# Altium PCB breakout_breadboard.PcbDoc
Units mm, origin at the board's own origin, x right, y up, seen from the top; angles counter-clockwise.
Board outline 113.33 x 27.99 mm, 2 copper layers (Top Layer, Bottom Layer), stack 1.661 mm thick; 3 components, 59 nets, 183 pads, 38 vias.
Unrouted connection lines stored in the file: 7.
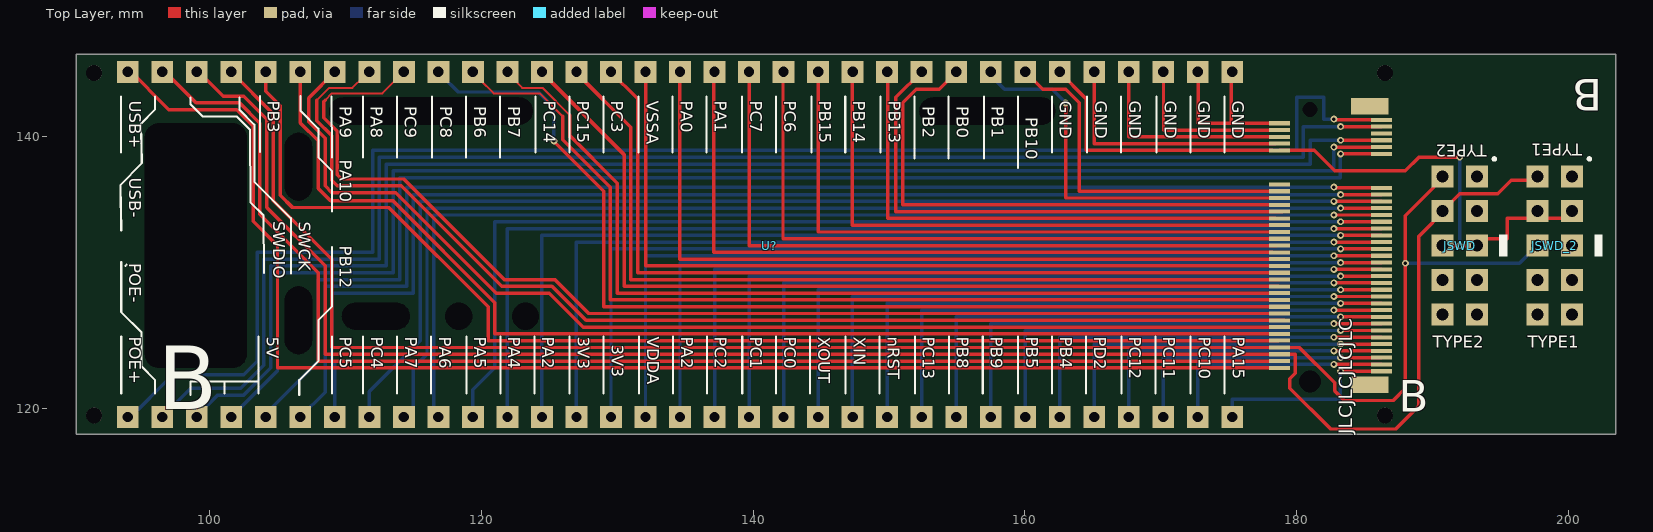
[diagram p0: Top Layer view]
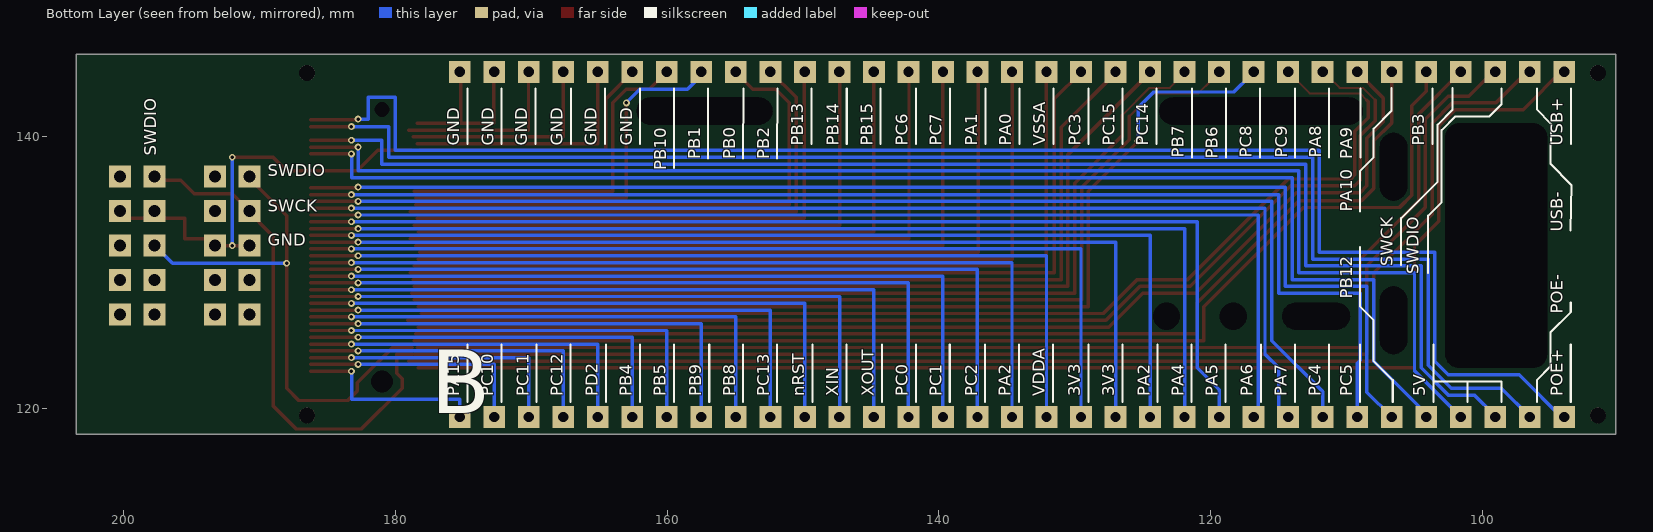
[diagram p1: Bottom Layer view, seen from below]

## Layer stack, top to bottom
Top Solder: solder mask 0.0102, Solder Resist, Dk 3.5
Top Layer: signal copper 0.0356
Dielectric 1: core 1.59, FR-4, Dk 4.2
Bottom Layer: signal copper 0.0356
Bottom Solder: solder mask 0.0102, Solder Resist, Dk 3.5

## Board outline
90.17,118.11 90.17,146.097 203.5,146.097 203.5,118.11

## Design rules (kind name [scope] priority, off if disabled: settings)
Clearance [All] p1: gap=0.2 ignorepadtopadclearanceinfootprint=FALSE except(0: Arc-Hole Track-Hole SMDPad-Hole THPad-Hole Via-Hole Fill-Hole Poly-Hole Region-Hole Text-Hole)
PolygonConnect [All] p1: thpad.connectstyle=Relief thpad.reliefconductorwidth=0.254 thpad.reliefentries=4 thpad.polygonreliefangle="90 Angle" thpad.airgapwidth=0.254 smdpad.connectstyle=Relief smdpad.reliefconductorwidth=0.254 smdpad.reliefentries=4 smdpad.polygonreliefangle="90 Angle" smdpad.airgapwidth=0.254 via.connectstyle=Direct via.reliefconductorwidth=0.254 via.reliefentries=4 via.polygonreliefangle="90 Angle" via.airgapwidth=0.254
RoutingVias [All] p1: holewidth=0.711 width=1.27 viastyle="Through Hole" minholewidth=0.711 minwidth=1.27 maxholewidth=0.711 maxwidth=1.27
SolderMaskExpansion [All] p1: expansion=0.102
Width [All] p1: maxlimit=1 minlimit=0.254 preferedwidth=0.254
30 further rules are at their usual default settings.

## Components (designator, comment, footprint, x,y, rotation, side; value= is the part's Value field where it differs from the comment)
JSWD "DS1023-2*5SF11" HDR_FEM_2X5P 192,132 r270 top
JSWD_2 "DS1023-2*5SF11" HDR_FEM_2X5P 199,132 r270 top
U? "BITSNAP_GF_B" POWERNET-MAC 182.74,132 r90 top

## Footprints (in the part's own frame and the unit in brackets; to place one, negate y for a bottom-side part, rotate by r counter-clockwise, add the part's x,y. Pads: shape width x height; smd on the part's side, far side on the other; paste and mask are expansions set on the pad)
HDR_FEM_2X5P [mm] "10 Pin 2 Row Header"
  rect 1.6x1.6 hole 0.9: 1(-5.08,1.27) 2(-5.08,-1.27) 3(-2.54,1.27) 4(-2.54,-1.27) 5(0,1.27) 6(0,-1.27) 7(2.54,1.27) 8(2.54,-1.27) 9(5.08,1.27) 10(5.08,-1.27)
  silkscreen extent -6.47,2.44 -6.27,2.64
POWERNET-MAC [mm] "IC - Powernet MAC - NGFF B KEY, TE 2199119-3"
  rect 0.3x1.55 smd: 1(9.25,-3.5) 2(9,4) 3(8.75,-3.5) 4(8.5,4) 5(8.25,-3.5) 6(8,4) 7(7.75,-3.5) 8(7.5,4) 9(7.25,-3.5) 10(7,4) 11(6.75,-3.5) 20(4.5,4) 21(4.25,-3.5) 22(4,4) 23(3.75,-3.5) 24(3.5,4) 25(3.25,-3.5) 26(3,4) 27(2.75,-3.5) 28(2.5,4) 29(2.25,-3.5) 30(2,4) 31(1.75,-3.5) 32(1.5,4) 33(1.25,-3.5) 34(1,4) 35(0.75,-3.5) 36(0.5,4) 37(0.25,-3.5) 38(0,4) 39(-0.25,-3.5) 40(-0.5,4) 41(-0.75,-3.5) 42(-1,4) 43(-1.25,-3.5) 44(-1.5,4) 45(-1.75,-3.5) 46(-2,4) 47(-2.25,-3.5) 48(-2.5,4) 49(-2.75,-3.5) 50(-3,4) 51(-3.25,-3.5) 52(-3.5,4) 53(-3.75,-3.5) 54(-4,4) 55(-4.25,-3.5) 56(-4.5,4) 57(-4.75,-3.5) 58(-5,4) 59(-5.25,-3.5) 60(-5.5,4) 61(-5.75,-3.5) 62(-6,4) 63(-6.25,-3.5) 64(-6.5,4) 65(-6.75,-3.5) 66(-7,4) 67(-7.25,-3.5) 68(-7.5,4) 69(-7.75,-3.5) 70(-8,4) 71(-8.25,-3.5) 72(-8.5,4) 73(-8.75,-3.5) 74(-9,4) 75(-9.25,-3.5)
  round 0 hole 1.6 unplated: 76(-10,1.75)
  round 0 hole 1.1 unplated: 76(10,1.75)
  round 1.524 hole 2 slot 7 at 90 deg unplated: H(-8,83.9) H(8,83.9)
  round 1.524 hole 2 slot 5 at 0 deg unplated: H(-5.5,76.2) H(5.8,76.2)
  round 1.524 hole 2 slot 5 at 90 deg unplated: H(-5.2,70.5)
  round 1.524 hole 2 unplated: H(-5.2,59.5) H(-5.2,64.4)
  round 1.524 hole 2 slot 18 at 0 deg unplated: H(0,86.5) H(0,86) H(0,85.5) H(0,85) H(0,84.5) H(0,84) H(0,83.5) H(0,83) H(0,82.5) H(0,82) H(0,81.5) H(0,81.1) H(0,81)
  round 1.524 hole 2 slot 15 at 90 deg unplated: H(9.9,66.45)
  round 1.524 hole 2 slot 10 at 90 deg unplated: H(9.9,25.5)
  rect 1.2x2.75 smd: M(-10.25,-2.65) M(10.25,-2.65)
  Bottom Layer pour cut-out: -17.2,17.6
  Bottom Layer pour cut-out: -17.2,17.6
  body extent -10.99,-4.1 11.01,91.64, height 16.88

## Part data
JSWD JSWD_2: "J - JACK - PIN_HEADER 2X5P", JLC Availability=Extended, LCSC Part #=C92270
U?: library part POWERNET_MAC, "U - IC - Bitsnap CPU, NGFF B Key", LCSC Part #=C2761344, Manufacturer=Foxconn, Manufacturer P/N=AS0BC21-S30BB-7H

## Free pads (board coordinates)
  rect 1.6x1.6 hole 0.762: 2(93.98,119.38) 2(93.98,144.78) 2(96.52,119.38) 2(96.52,144.78) 2(99.06,119.38) 2(99.06,144.78) 2(101.6,119.38) 2(101.6,144.78) 2(104.14,119.38) 2(104.14,144.78) 2(106.68,119.38) 2(106.68,144.78) 2(109.22,119.38) 2(109.22,144.78) 2(111.76,119.38) 2(111.76,144.78) 2(114.3,119.38) 2(114.3,144.78) 2(116.84,119.38) 2(116.84,144.78) 2(119.38,119.38) 2(119.38,144.78) 2(121.92,119.38) 2(121.92,144.78) 2(124.46,119.38) 2(124.46,144.78) 2(127,119.38) 2(127,144.78) 2(129.54,119.38) 2(129.54,144.78) 2(132.08,119.38) 2(132.08,144.78) 2(134.62,119.38) 2(134.62,144.78) 2(137.16,119.38) 2(137.16,144.78) 2(139.7,119.38) 2(139.7,144.78) 2(142.24,119.38) 2(142.24,144.78) 2(144.78,119.38) 2(144.78,144.78) 2(147.32,119.38) 2(147.32,144.78) 2(149.86,119.38) 2(149.86,144.78) 2(152.4,119.38) 2(152.4,144.78) 2(154.94,119.38) 2(154.94,144.78) 2(157.48,119.38) 2(157.48,144.78) 2(160.02,119.38) 2(160.02,144.78) 2(162.56,119.38) 2(162.56,144.78) 2(165.1,119.38) 2(165.1,144.78) 2(167.64,119.38) 2(167.64,144.78) 2(170.18,119.38) 2(170.18,144.78) 2(172.72,119.38) 2(172.72,144.78) 2(175.26,119.38) 2(175.26,144.78)
  round 1.152 hole 1.152 unplated: 11(91.5,119.5) 11(91.5,144.7) 11(186.5,119.5) 11(186.5,144.7)

## Via types
v1: diameter 0.508, hole 0.254, Top Layer to Bottom Layer, tented both sides, 38 vias

## Nets (pads, with @x,y where several pads share a name; then routed paths per layer and width w, separated by ;. In a path a pad name is that pad's centre, name@x,y a point inside that pad or via, vN(x,y) a via of type N, cw(c..) or ccw(c..) an arc to the next point about the centre after c; other vN are vias at no path point)
&^~PB6_SCL1: pad.2@119.38,144.78 U?.54 | length 71.3
  Top Layer w0.15: pad.2@119.9,144.2 120.9,143.2 124.3,143.2 126,141.5
  Top Layer w0.254: 126,141.5 126,139.8 129.5,136.3 129.5,128 U?.54@178.6,128
&^~PB7_SDA1: pad.2@121.92,144.78 U?.52 | length 69.3
  Top Layer w0.15: pad.2@121.9,144.7 123,143.6 124.5,143.6 126.5,141.6
  Top Layer w0.254: 126.5,140 126.5,140.1 ; 126.5,141.6 126.5,140.1 ; U?.52@178.8,128.5 U?.52 130,128.5 130,136.6 126.5,140.1
&~PA1_ADC1: pad.2@137.16,144.78 U?.40 | length 54.4
  Top Layer w0.254: pad.2@137.1,144.8 137.1,131.5 176.2,131.5 U?.40@178.2,131.5
^PA15: pad.2@175.26,119.38 U?.75 | length 14.5
  Top Layer w0.254: v1@183.19,122.7 183.19,122.75 U?.75
  Bottom Layer w0.254: pad.2@175.25,119.35 175.25,120.7 183.2,120.7 v1@183.2,122.75
  other v1: 183.24,122.75
^PB2_BOOT1: pad.2@152.4,144.78 U?.28 | length 39.5
  Top Layer w0.254: pad.2@152.4,144.8 150.5,142.9 150.5,134.5 U?.28 U?.28@178.9,134.5
^PB4: pad.2@162.56,119.38 U?.65 | length 29.5
  Top Layer w0.254: v1(182.74,125.25) U?.65
  Bottom Layer w0.254: pad.2@162.56,119.4 162.56,125.25 182.7,125.25 v1@182.7,125.2
^PB10_SCL2_RX3: pad.2@160.02,144.78 U?.22 | length 26.1
  Top Layer w0.254: pad.2@160,144.8 160.02,144.78 161.3,143.5 163,143.5 164,142.5 164,136 U?.22@178.6,136
^PB11_SDA2_TX3: U?.20
^PB12_SS2: pad.2@106.68,119.38 U?.21 | length 95.4
  Top Layer w0.254: v1(182.74,136.3) 182.74,136.25 U?.21
  Bottom Layer w0.254: pad.2@106.68,119.4 108.5,121.22 108.5,129 114.5,129 114.5,136.3 v1@182.7,136.3
^PB13_SCK2: pad.2@149.86,144.78 U?.30 | length 39.6
  Top Layer w0.254: pad.2@149.9,144.7 149.9,134 175.8,134 ; 176.2,134 175.8,134 ; U?.30@178.4,134 175.8,134
^PB14_MISO2: pad.2@147.32,144.78 U?.32 | length 42.5
  Top Layer w0.254: pad.2@147.3,144.7 147.3,133.5 176.2,133.5 U?.32@178.6,133.5
^PB15_MOSI2: pad.2@144.78,144.78 U?.34 | length 45.7
  Top Layer w0.254: pad.2@144.8,144.7 144.8,133 175.7,133 ; 176.2,133 175.7,133 ; U?.34@178.3,133 175.7,133
^~PA8: pad.2@111.76,144.78 U?.60 | length 84.8
  Top Layer w0.15: 107.9,142.7 108.8,143.6 110.5,143.6 pad.2@111.3,144.4
  Top Layer w0.25: 107.9,141.2 107.9,142.7 ; 109,140.1 109,136.8 109.4,136.4 114.1,136.4 121.5,129 125.2,129 127.7,126.5 176.2,126.5 U?.60@179.1,126.5
  Top Layer w0.254: 107.9,141.2 109,140.1
^~PA9_TX1: pad.2@109.22,144.78 U?.62 | length 83.9
  Top Layer w0.254: pad.2@109.2,144.8 109.22,144.78 107.3,142.86 107.3,141.1 108.5,139.9 108.5,136.4 109,135.9 113.7,135.9 121.1,128.5 125,128.5 127.5,126 176.1,126 ; 176.2,126 176.1,126 ; U?.62@178.3,126 176.1,126
^~PA10_RX1: pad.2@106.68,144.78 U?.64 | length 85.6
  Top Layer w0.254: pad.2@106.68,144.78 106.68,141.02 108,139.7 108,136.2 108.9,135.3 113.5,135.3 121,127.8 121,125.5 176,125.5 ; 176.2,125.5 176,125.5 ; U?.64@178.5,125.5 176,125.5
eth_V+: pad.2@93.98,119.38 U?.1 | length 115.1
  Top Layer w0.254: v1(182.74,141.3) 182.74,141.25 U?.1
  Bottom Layer w0.254: pad.2@94,119.2 97.3,122.5 102.5,122.5 103.5,123.5 103.5,131.5 112,131.5 112,139 180,139 180,142.9 182,142.9 182,141.3 v1(182.74,141.3)
eth_V-: pad.2@96.52,119.38 U?.3 | length 108.9
  Top Layer w0.254: v1(183.24,140.75) U?.3
  Bottom Layer w0.254: pad.2@96.5,119.4 98.6,121.5 102.3,121.5 104,123.2 104,131 112.5,131 112.5,138.5 180.5,138.5 180.5,140.75 v1(183.24,140.75)
GND: JSWD.5 JSWD.6 JSWD_2.3 JSWD_2.4 pad.2@162.56,144.78 pad.2@165.1,144.78 pad.2@167.64,144.78 pad.2@170.18,144.78 pad.2@172.72,144.78 pad.2@175.26,144.78 U?.2 U?.4 U?.6 U?.8 U?.10 | length 114.1
  Top Layer w0.254: pad.2@162.55,144.75 164.5,142.8 164.5,139 U?.10@178.2,139 ; pad.2@165.1,144.8 165.1,144.78 165.1,139.5 175.3,139.5 ; pad.2@167.65,144.75 167.65,140 176.1,140 ; pad.2@170.2,144.75 170.2,140.5 U?.4 U?.4@179,140.5 ; pad.2@172.75,144.75 172.75,141 175.2,141 ; pad.2@175.2,144.8 175.2,141 ; 176.2,139.5 175.3,139.5 ; 176.2,140 176.1,140 ; U?.8@178.4,139.5 175.3,139.5 ; U?.2@178.4,141 175.2,141 ; U?.6@178.7,140 176.1,140 ; U?.10@178.8,139 181.3,139 182.8,137.5 188,137.5 189,138.5 v1(192,138.5) ; JSWD.6 v1(192,132) JSWD.5 193.77,132.5 195.5,132.5 195.5,134 JSWD_2.3@200.5,134
  Bottom Layer w0.254: v1(192,132) v1(192,138.5)
NRST: pad.2@149.86,119.38 U?.55 | length 44.9
  Top Layer w0.254: v1(183.24,127.75) U?.55
  Bottom Layer w0.254: pad.2@149.86,119.3 149.86,127.75 v1(183.24,127.75) 183.3,127.75 v1@183.3,127.7
PA4_ADC4_SS1: pad.2@121.92,119.38 U?.33 | length 78.3
  Top Layer w0.254: v1(182.74,133.25) U?.33
  Bottom Layer w0.254: pad.2@121.92,119.35 121.92,133.25 v1(182.74,133.25) 182.8,133.25 v1@182.8,133.3
PA5_ADC5_SCK1: pad.2@119.38,119.38 U?.31 | length 80.4
  Top Layer w0.254: v1(183.24,133.75) U?.31
  Bottom Layer w0.254: pad.2@119.38,119.3 119.38,119.38 119.38,121.38 121,123 121,133.75 183.2,133.75 v1@183.2,133.7
PB3: pad.2@104.14,144.78 U?.66 | length 88.8
  Top Layer w0.254: pad.2@104.14,144.78 104.14,143.36 105.2,142.3 105.2,135.7 106.1,134.8 113.2,134.8 120.5,127.5 120.5,125 176.2,125 U?.66@178.6,125
PB5: pad.2@160.02,119.38 U?.63 | length 32.6
  Top Layer w0.254: v1(183.24,125.75) U?.63
  Bottom Layer w0.254: pad.2@160.02,119.35 160.02,125.75 183.2,125.75 v1@183.2,125.7
PC0: pad.2@142.24,119.38 U?.49 | length 54
  Top Layer w0.254: v1(182.74,129.25) U?.49
  Bottom Layer w0.254: pad.2@142.24,119.38 142.24,129.25 180.2,129.25 v1(182.74,129.25) 182.8,129.25 v1@182.8,129.2
PC1: pad.2@139.7,119.38 U?.47 | length 56.6
  Top Layer w0.254: v1(183.24,129.75) U?.47
  Bottom Layer w0.254: pad.2@139.7,119.75 139.7,129.75 183.2,129.75 v1@183.2,129.8
PC2: pad.2@137.16,119.38 U?.45 | length 59.8
  Top Layer w0.254: v1(182.74,130.25) U?.45
  Bottom Layer w0.254: pad.2@137.16,119.5 137.16,130.25 182.7,130.25 v1@182.7,130.3
PC3: pad.2@129.54,144.78 U?.46 | length 63
  Top Layer w0.254: pad.2@129.5,144.8 131.5,142.8 131.5,130 U?.46 U?.46@178.9,130
PC4: pad.2@111.76,119.38 U?.25 | length 88.2
  Top Layer w0.254: v1(182.74,135.25) U?.25
  Bottom Layer w0.254: pad.2@111.76,119.3 111.76,119.38 111.76,121.26 115.5,125 115.5,135.25 182.7,135.25 v1@182.7,135.3
PC5: pad.2@109.22,119.38 U?.23 | length 93.9
  Top Layer w0.254: v1(183.24,135.75) U?.23
  Bottom Layer w0.254: pad.2@109.22,119.2 109.22,119.38 109.22,123.338 109,123.557 109,128.5 115,128.5 115,135.75 183.2,135.75 v1@183.2,135.7
PC6: pad.2@142.24,144.78 U?.36 | length 49
  Top Layer w0.254: pad.2@142.2,144.8 142.2,132.5 U?.36 U?.36@178.9,132.5
PC7: pad.2@139.7,144.78 U?.38 | length 51.7
  Top Layer w0.254: pad.2@139.7,144.7 139.7,132 176,132 ; 176.2,132 176,132 ; U?.38@178.5,132 176,132
PC8: pad.2@116.84,144.78 U?.56 | length 74.7
  Top Layer w0.254: v1@125.3,139.7 129,136 129,127.5 176.2,127.5 U?.56@178.3,127.5
  Bottom Layer w0.254: pad.2@117.1,144.5 118.3,143.3 124.2,143.3 125.34,142.16 v1(125.34,139.7)
PC9: pad.2@114.3,144.78 U?.58 | length 85.6
  Top Layer w0.15: 108.5,142.7 109,143.2 112.72,143.2 pad.2@114.3,144.78 ; pad.2@114.3,144.8 pad.2@114.31,144.79
  Top Layer w0.254: 108.5,142.7 108.4,142.6 108.4,141.4 109.4,140.4 109.4,137.2 109.7,136.9 114.3,136.9 121.7,129.5 125.4,129.5 127.9,127 128.5,127 U?.58@178.1,127
PC10: pad.2@172.72,119.38 U?.73 | length 17.5
  Top Layer w0.254: v1(182.74,123.25) U?.73
  Bottom Layer w0.254: pad.2@172.72,119.4 172.72,123.25 v1(182.74,123.25) 182.8,123.25 v1@182.8,123.3
PC11: pad.2@170.18,119.38 U?.71 | length 20.6
  Top Layer w0.254: v1(183.24,123.75) U?.71
  Bottom Layer w0.254: pad.2@170.18,119.3 170.18,123.75 v1(183.24,123.75) 183.3,123.75 v1@183.3,123.7
PC12: pad.2@167.64,119.38 U?.69 | length 23.5
  Top Layer w0.254: v1(182.74,124.25) U?.69
  Bottom Layer w0.254: pad.2@167.64,119.38 167.64,124.25 182.7,124.25 v1@182.7,124.3
PC13: pad.2@152.4,119.38 U?.57 | length 41.8
  Top Layer w0.254: v1(182.74,127.25) U?.57
  Bottom Layer w0.254: pad.2@152.4,119.3 152.4,127.25 182.7,127.25 v1@182.7,127.2
PC14: pad.2@124.46,144.78 U?.50 | length 66.3
  Top Layer w0.254: pad.2@124.5,144.7 130.5,138.7 130.5,129 U?.50@178.6,129
PC15: pad.2@127,144.78 U?.48 | length 64.6
  Top Layer w0.254: pad.2@127,144.7 131,140.7 131,129.5 176.2,129.5 U?.48@178.7,129.5
PD2: pad.2@165.1,119.38 U?.67 | length 26.7
  Top Layer w0.254: v1(183.24,124.75) U?.67
  Bottom Layer w0.254: pad.2@165.1,119.35 165.1,124.75 v1(183.24,124.75) 183.3,124.75 v1@183.3,124.8
SWDCK: JSWD.2 JSWD_2.6 pad.2@101.6,144.78 U?.68 | length 131.5
  Top Layer w0.254: pad.2@101.6,144.8 101.6,144.78 104.7,141.68 104.7,135.3 109,131 109,124.5 175.9,124.5 ; 176.2,124.5 175.9,124.5 ; U?.68@178.4,124.5 175.9,124.5 ; U?.68 180.2,124.5 182.8,121.9 182.8,121.3 183.5,120.6 187.1,120.6 188,121.5 v1(188,130.7) 188,134.2 190.8,137 JSWD.2@191,137
  Bottom Layer w0.254: v1(188,130.7) 196.4,130.7 JSWD_2.6@197.5,131.8
SWDIO: JSWD.4 JSWD_2.2 pad.2@99.06,144.78 U?.70 | length 133.7
  Top Layer w0.254: pad.2@99.5,144.5 101,143 102.5,143 104.2,141.3 104.2,134.8 108.5,130.5 108.5,124 176.2,124 U?.70@178.6,124 ; U?.70 179.9,124 179.9,122.6 179.5,122.2 179.5,121.5 182.5,118.5 187.3,118.5 189,120.2 189,132.7 191,134.7 JSWD.4@191,134.81 ; JSWD.4 JSWD.4@191,134.81 ; JSWD.4@191,135 JSWD.4@191,134.81 ; JSWD_2.2@197.4,136.8 195.8,136.8 194.8,135.8 191.99,135.8 JSWD.4@191,134.81
USB_DM: pad.2@96.52,144.78 U?.72 | length 99.1
  Top Layer w0.254: pad.2@96.5,145 99,142.5 102.2,142.5 103.7,141 103.7,134.3 108,130 108,123.5 U?.72 U?.72@179,123.5
USB_DP: pad.2@93.98,144.78 U?.74 | length 102.8
  Top Layer w0.254: pad.2@94,145 97,142 102,142 103.2,140.8 103.2,133.8 105,132 105,123 U?.74@178.3,123
VCC_3V3: pad.2@127,119.38 pad.2@129.54,119.38 U?.37 U?.39 | length 141.5
  Top Layer w0.254: v1(182.74,132.25) U?.37 ; v1(183.24,131.75) U?.39
  Bottom Layer w0.254: pad.2@127,119.3 127,132.25 v1(182.74,132.25) 182.8,132.25 v1@182.8,132.3 ; pad.2@129.54,119.35 129.54,131.75 v1(183.24,131.75) 183.3,131.75 v1@183.3,131.8
VCC_5V: pad.2@99.06,119.38 pad.2@101.6,119.38 pad.2@104.14,119.38 U?.7 U?.9 U?.11 | length 307
  Top Layer w0.254: v1(182.74,139.25) U?.9 ; v1(183.24,138.75) U?.11 ; v1(183.24,139.75) U?.7
  Bottom Layer w0.254: pad.2@99.1,119.5 100.6,121 102.5,121 104.5,123 104.5,130.5 113,130.5 113,138 181,138 181,139.75 v1@183.2,139.75 ; pad.2@101.5,119.3 105,122.8 105,130 113.5,130 113.5,137.5 180.99,137.5 181,137.51 182.01,137.51 ; pad.2@104.2,119.7 108,123.5 108,129.5 114,129.5 114,137 183.2,137 v1@183.2,138.7 ; 182,137.5 182.74,137.5 v1(182.74,139.25) 182.8,139.25 v1@182.8,139.3 ; v1@183.2,138.75 v1(183.24,138.75) ; v1@183.2,139.7 v1@183.2,139.75 ; v1(183.24,139.75) v1@183.2,139.75
VDDA: pad.2@132.08,119.38 U?.41 | length 66.2
  Top Layer w0.254: v1@182.74,131.3 v1(182.74,131.25) U?.41
  Bottom Layer w0.254: pad.2@132.08,119.38 132.08,131.25 v1(182.74,131.25) 182.8,131.25 v1@182.8,131.2
VSSA: pad.2@132.08,144.78 U?.44 | length 60.8
  Top Layer w0.254: pad.2@132.1,144.8 132.1,130.5 U?.44@178.6,130.5
XIN: pad.2@147.32,119.38 U?.53 | length 47.9
  Top Layer w0.254: v1@182.7,128.3 182.75,128.25 U?.53
  Bottom Layer w0.254: pad.2@147.3,119.4 147.3,128.25 v1(182.74,128.25)
XOUT: pad.2@144.78,119.38 U?.51 | length 50.8
  Top Layer w0.254: v1@183.3,128.7 183.35,128.75 U?.51
  Bottom Layer w0.254: pad.2@144.8,119.4 144.8,128.75 v1(183.24,128.75)
~PA0_ADC0: pad.2@134.62,144.78 U?.42 | length 57.4
  Top Layer w0.254: pad.2@134.6,144.7 134.6,131 176.2,131 U?.42@178.3,131
~PA2_ADC2_TX2: pad.2@134.62,119.38 U?.43 | length 62.7
  Top Layer w0.254: v1(183.24,130.75) U?.43
  Bottom Layer w0.254: pad.2@134.62,119.65 134.62,130.75 183.2,130.75 v1@183.2,130.8
~PA3_ADC3_RX2: pad.2@124.46,119.38 U?.35 | length 75.4
  Top Layer w0.254: v1(183.24,132.75) U?.35
  Bottom Layer w0.254: pad.2@124.46,119.1 124.46,132.75 183.2,132.75 v1@183.2,132.7
~PA6_ADC6_MISO1: pad.2@116.84,119.38 U?.29 | length 84.9
  Top Layer w0.254: v1(182.74,134.25) U?.29
  Bottom Layer w0.254: pad.2@116.84,119.38 116.5,119.72 116.5,134.25 180.2,134.25 v1(182.74,134.25) 182.8,134.25 v1@182.8,134.3
~PA7_ADC7_MOSI1: pad.2@114.3,119.38 U?.27 | length 86.4
  Top Layer w0.254: v1(183.24,134.75) U?.27
  Bottom Layer w0.254: pad.2@114.3,119.3 115,120 115,123 116,124 116,134.75 183.2,134.75 v1@183.2,134.7
~PB0_ADC8: pad.2@154.94,144.78 U?.26 | length 39.8
  Top Layer w0.254: pad.2@154.9,144.7 153.7,143.5 152,143.5 151,142.5 151,135 U?.26@178.5,135
~PB1_ADC9: pad.2@157.48,144.78 U?.24 | length 28.8
  Top Layer w0.254: v1(163,142.5) 163,135.5 U?.24@178.5,135.5
  Bottom Layer w0.254: pad.2@157.5,144.5 158.5,143.5 162,143.5 v1(163,142.5)
~PB8_CANTX: pad.2@154.94,119.38 U?.59 | length 38.7
  Top Layer w0.254: v1(183.24,126.75) U?.59
  Bottom Layer w0.254: pad.2@154.94,119.4 154.94,126.75 183.2,126.75 v1@183.2,126.7
~PB9_CANRX: pad.2@157.48,119.38 U?.61 | length 35.8
  Top Layer w0.254: v1(182.74,126.25) U?.61
  Bottom Layer w0.254: pad.2@157.48,119.3 157.48,126.25 v1(182.74,126.25) 182.8,126.25 v1@182.8,126.2
pads on no net: JSWD.1 JSWD.3 JSWD.7 JSWD.8 JSWD.9 JSWD.10 JSWD_2.1 JSWD_2.5 JSWD_2.7 JSWD_2.8 JSWD_2.9 JSWD_2.10 U?.5 U?.76 U?.H U?.M

## Polygon pours and split planes (outlines as drawn)
no net on Bottom Layer "Bottom Layer-No Net" (solid, pour order 16): 102.6,124.1
no net on Bottom Layer "Bottom Layer-No Net 1" (solid, pour order 14): 122.9,124.1
no net on Bottom Layer "Bottom Layer-No Net 2" (solid, pour order 12): 143.2,124.1
no net on Bottom Layer "Bottom Layer-No Net 3" (solid, pour order 10): 163.5,124.1

## Silkscreen, mask and mechanical layers (free items; w line width, h text height)
Top Overlay:
  rectangle: 201.9,131.2 202.5,132.8
  rectangle: 194.9,131.2 195.5,132.8
  lines w0.15: 93.48,138.86 93.48,142.96 ; 93.5,121.1 93.5,125.3 ; 93.5,130.8 93.5,127.1 95,125.6 95,123.1 96,122.1 96,121.1 ; 93.5,133.1 93.431,136.428 95.009,138.073 94.949,140.947 95.999,142.042 95.98,142.96 ; 93.8,130.5 93.9,130.6 ; 98.6,121 98.6,122 101.1,122 ; 98.601,142.9 98.604,142.383 99.518,141.482 101.986,141.5 102.961,140.538 103,135.186 103.969,134.23 104,130 ; 101.1,121.1 101.1,122 ; 102.2,142.9 102.2,142 103.3,140.9 103.3,136.7 105.98,134.02 105.98,129.96 ; 103.6,121.1 103.6,125.3 ; 103.6,122 101.1,122 ; 103.7,138.9 103.7,143 ; 106.6,121 106.6,122.1 108,123.5 108,126.5 109,127.5 109,131.9 ; 106.7,143 106.7,141.9 108,140.6 108,138.5 109,137.5 ; 108.98,142.96 109,138.5 ; 109,121.1 109,125.3 ; 109,134.5 109,137.5 ; 109,135 109,137.5 ; 111.28,142.96 111.3,138.5 ; 111.3,121.1 111.3,125.3 ; 113.78,138.5 113.78,142.96 ; 113.8,121.1 113.8,125.3 ; 116.3,121.1 116.3,125.3 ; 116.38,138.5 116.38,142.96 ; 118.88,138.5 118.88,142.96 ; 118.9,121.1 118.9,125.3 ; 121.38,138.5 121.38,142.96 ; 121.4,121.1 121.4,125.3 ; 123.9,121.1 123.9,125.3 ; 123.98,138.86 123.98,142.96 ; 126.48,138.86 126.48,142.96 ; 126.5,121.1 126.5,125.3 ; 128.98,138.86 128.98,142.96 ; 129,121.1 129,125.3 ; 131.58,138.86 131.58,142.96 ; 131.6,121.1 131.6,125.3 ; 134.08,138.86 134.08,142.96 ; 134.1,121.1 134.1,125.3 ; 136.58,138.86 136.58,142.96 ; 136.6,121.1 136.6,125.3 ; 139.18,138.86 139.18,142.96 ; 139.2,121.1 139.2,125.3 ; 141.68,138.86 141.68,142.96 ; 141.7,121.1 141.7,125.3 ; 144.2,121.1 144.2,125.3 ; 144.28,138.86 144.28,142.96 ; 146.78,138.86 146.78,142.96 ; 146.8,121.1 146.8,125.3 ; 149.3,121.1 149.3,125.3 ; 149.38,138.86 149.38,142.96 ; 151.88,138.4 151.88,142.96 ; 151.9,121.1 151.9,125.3 ; 154.38,138.4 154.38,142.96 ; 154.4,121.1 154.4,125.3 ; 156.9,121.1 156.9,125.3 ; 156.98,138.4 156.98,142.96 ; 159.48,137.7 159.48,142.96 ; 159.5,121.1 159.5,125.3 ; 161.98,138.86 161.98,142.96 ; 162,121.1 162,125.3 ; 164.5,121.1 164.5,125.3 ; 164.58,138.86 164.58,142.96 ; 167.08,138.86 167.08,142.96 ; 167.1,121.1 167.1,125.3 ; 169.6,121.1 169.6,125.3 ; 169.68,138.86 169.68,142.96 ; 172.18,138.86 172.18,142.96 ; 172.2,121.1 172.2,125.3 ; 174.68,138.86 174.68,142.96 ; 174.7,121.1 174.7,125.3
  text "B" at 202.5,145 h4 r180
  text "USB+" at 93.78,142.66 h1.52 r270
  text "PB3" at 103.98,142.66 h1.52 r270
  text "PC14" at 124.28,142.66 h1.52 r270
  text "PC15" at 126.78,142.66 h1.52 r270
  text "PC3" at 129.28,142.66 h1.52 r270
  text "VSSA" at 131.88,142.66 h1.52 r270
  text "PA0" at 134.38,142.66 h1.52 r270
  text "PA1" at 136.88,142.66 h1.52 r270
  text "PC7" at 139.48,142.66 h1.52 r270
  text "PC6" at 141.98,142.66 h1.52 r270
  text "PB15" at 144.58,142.66 h1.52 r270
  text "PB14" at 147.08,142.66 h1.52 r270
  text "PB13" at 149.68,142.66 h1.52 r270
  text "GND" at 162.28,142.66 h1.52 r270
  text "GND" at 164.88,142.66 h1.52 r270
  text "GND" at 167.38,142.66 h1.52 r270
  text "GND" at 169.98,142.66 h1.52 r270
  text "GND" at 172.48,142.66 h1.52 r270
  text "GND" at 174.98,142.66 h1.52 r270
  text "PA9" at 109.28,142.26 h1.52 r270
  text "PA8" at 111.58,142.26 h1.52 r270
  text "PC9" at 114.08,142.26 h1.52 r270
  text "PC8" at 116.68,142.26 h1.52 r270
  text "PB6" at 119.18,142.26 h1.52 r270
  text "PB7" at 121.68,142.26 h1.52 r270
  text "PB2" at 152.18,142.26 h1.52 r270
  text "PB0" at 154.68,142.26 h1.52 r270
  text "PB1" at 157.28,142.26 h1.52 r270
  text "PB10" at 159.78,141.46 h1.52 r270
  text "TYPE1" at 201,139.8 h1.52 r180
  text "TYPE2" at 194,139.7 h1.52 r180
  text "PA10" at 109.3,138.3 h1.52 r270
  text "USB-" at 93.8,137 h1.52 r270
  text "SWDIO" at 104.4,133.8 h1.52 r270
  text "SWCK" at 106.28,133.76 h1.52 r270
  text "PB12" at 109.3,132 h1.52 r270
  text "POE-" at 93.8,130.7 h1.52 r270
  text "POE+" at 93.8,125.3 h1.52 r270
  text "5V" at 103.9,125.3 h1.52 r270
  text "PC5" at 109.3,125.3 h1.52 r270
  text "PC4" at 111.6,125.3 h1.52 r270
  text "PA7" at 114.1,125.3 h1.52 r270
  text "PA6" at 116.6,125.3 h1.52 r270
  text "PA5" at 119.2,125.3 h1.52 r270
  text "PA4" at 121.7,125.3 h1.52 r270
  text "PA2" at 124.2,125.3 h1.52 r270
  text "3V3" at 126.8,125.3 h1.52 r270
  text "VDDA" at 131.9,125.3 h1.52 r270
  text "PA2" at 134.4,125.3 h1.52 r270
  text "PC2" at 136.9,125.3 h1.52 r270
  text "PC1" at 139.5,125.3 h1.52 r270
  text "PC0" at 142,125.3 h1.52 r270
  text "XOUT" at 144.5,125.3 h1.52 r270
  text "XIN" at 147.1,125.3 h1.52 r270
  text "nRST" at 149.6,125.3 h1.52 r270
  text "PC13" at 152.2,125.3 h1.52 r270
  text "PB8" at 154.7,125.3 h1.52 r270
  text "PB9" at 157.2,125.3 h1.52 r270
  text "PB5" at 159.8,125.3 h1.52 r270
  text "PB4" at 162.3,125.3 h1.52 r270
  text "PD2" at 164.8,125.3 h1.52 r270
  text "PC12" at 167.4,125.3 h1.52 r270
  text "PC11" at 169.9,125.3 h1.52 r270
  text "PC10" at 172.5,125.3 h1.52 r270
  text "PA15" at 175,125.3 h1.52 r270
  text "3V3" at 129.3,124.7 h1.52 r270
  text "TYPE2" at 190,124.2 h1.52
  text "TYPE1" at 197,124.2 h1.52
  text "B" at 187.5,119 h4
  text "B" at 96.2,118.4 h8
  text "JLCJLCJLCJLC" at 184.1,118.1 h1 r90
Bottom Overlay:
  lines w0.15: 93.48,139.46 93.48,143.56 ; 93.5,120.5 93.5,124.7 ; 93.5,127.8 93.5,127.1 95,125.6 95,123.1 96,122.1 96,120.5 ; 93.504,133.123 93.461,136.46 95.001,138.04 94.963,140.962 96,142.026 95.98,143.56 ; 98.58,143.56 98.58,142.42 99.5,141.5 102,141.5 103,140.5 103,135.2 104,134.2 104,130 ; 98.6,120.5 98.6,122 103.6,122 ; 101.1,120.5 101.1,122 ; 102.2,143.6 102.2,142 103.3,140.9 103.3,136.7 105.98,134.02 105.98,130.56 ; 103.6,120.5 103.6,124.7 ; 103.68,139.46 103.68,143.56 ; 106.6,120.5 106.6,122.1 108,123.5 108,126.5 109,127.5 109,131.9 ; 106.7,143.6 106.7,141.9 108,140.6 108,138.5 109,137.5 109,134.5 ; 108.98,138.5 108.98,143.56 ; 109,120.5 109,124.7 ; 111.28,138.5 111.28,143.56 ; 111.3,120.5 111.3,124.7 ; 113.78,138.5 113.78,143.56 ; 113.8,120.5 113.8,124.7 ; 116.3,120.5 116.3,124.7 ; 116.38,138.5 116.38,143.56 ; 118.88,138.5 118.88,143.56 ; 118.9,120.5 118.9,124.7 ; 121.38,138.5 121.38,143.56 ; 121.4,120.5 121.4,124.7 ; 123.9,120.5 123.9,124.7 ; 123.98,139.46 123.98,143.56 ; 126.48,139.46 126.48,143.56 ; 126.5,120.5 126.5,124.7 ; 128.98,139.46 128.98,143.56 ; 129,120.5 129,124.7 ; 131.58,139.46 131.58,143.56 ; 131.6,120.5 131.6,124.7 ; 134.08,139.46 134.08,143.56 ; 134.1,120.5 134.1,124.7 ; 136.58,139.46 136.58,143.56 ; 136.6,120.5 136.6,124.7 ; 139.18,139.46 139.18,143.56 ; 139.2,120.5 139.2,124.7 ; 141.68,139.46 141.68,143.56 ; 141.7,120.5 141.7,124.7 ; 144.2,120.5 144.2,124.7 ; 144.28,139.46 144.28,143.56 ; 146.78,139.46 146.78,143.56 ; 146.8,120.5 146.8,124.7 ; 149.3,120.5 149.3,124.7 ; 149.38,139.46 149.38,143.56 ; 151.88,143.56 151.9,138.4 ; 151.9,120.5 151.9,124.7 ; 154.38,143.56 154.4,138.4 ; 154.4,120.5 154.4,124.7 ; 156.9,120.5 156.9,124.7 ; 156.98,143.56 157,138.4 ; 159.48,137.7 159.48,143.56 ; 159.5,120.5 159.5,124.7 ; 161.98,139.46 161.98,143.56 ; 162,120.5 162,124.7 ; 164.5,120.5 164.5,124.7 ; 164.58,139.46 164.58,143.56 ; 167.08,139.46 167.08,143.56 ; 167.1,120.5 167.1,124.7 ; 169.6,120.5 169.6,124.7 ; 169.68,139.46 169.68,143.56 ; 172.18,139.46 172.18,143.56 ; 172.2,120.5 172.2,124.7 ; 174.68,139.46 174.68,143.56 ; 174.7,120.5 174.7,124.7
  text "USB+" at 93.78,139.36 h1.52 r270
  text "PB3" at 103.98,139.36 h1.52 r270
  text "PC14" at 124.28,139.36 h1.52 r270
  text "PC15" at 126.78,139.36 h1.52 r270
  text "PC3" at 129.28,139.36 h1.52 r270
  text "VSSA" at 131.88,139.36 h1.52 r270
  text "PA0" at 134.38,139.36 h1.52 r270
  text "PA1" at 136.88,139.36 h1.52 r270
  text "PC7" at 139.48,139.36 h1.52 r270
  text "PC6" at 141.98,139.36 h1.52 r270
  text "PB15" at 144.58,139.36 h1.52 r270
  text "PB14" at 147.08,139.36 h1.52 r270
  text "PB13" at 149.68,139.36 h1.52 r270
  text "GND" at 162.28,139.36 h1.52 r270
  text "GND" at 164.88,139.36 h1.52 r270
  text "GND" at 167.38,139.36 h1.52 r270
  text "GND" at 169.98,139.36 h1.52 r270
  text "GND" at 172.48,139.36 h1.52 r270
  text "GND" at 175.001,139.36 h1.52 r270
  text "SWDIO" at 197.3,138.6 h1.52 r270
  text "PA8" at 111.58,138.46 h1.52 r270
  text "PC9" at 114.08,138.46 h1.52 r270
  text "PC8" at 116.68,138.46 h1.52 r270
  text "PB7" at 121.68,138.46 h1.52 r270
  text "PB6" at 119.2,138.4 h1.52 r270
  text "PA9" at 109.28,138.36 h1.52 r270
  text "PB2" at 152.18,138.36 h1.52 r270
  text "PB0" at 154.68,138.36 h1.52 r270
  text "PB1" at 157.28,138.36 h1.52 r270
  text "PB10" at 159.78,137.56 h1.52 r270
  text "SWDIO" at 189.4,136.8 h1.52
  text "PA10" at 109.3,134.5 h1.52 r270
  text "SWCK" at 189.4,134.2 h1.52
  text "USB-" at 93.8,133 h1.52 r270
  text "GND" at 189.4,131.7 h1.52
  text "SWCK" at 106.301,130.46 h1.52 r270
  text "SWDIO" at 104.4,129.9 h1.52 r270
  text "PB12" at 109.3,128.1 h1.52 r270
  text "POE-" at 93.8,127 h1.52 r270
  text "POE+" at 93.8,120.9 h1.52 r270
  text "5V" at 103.9,120.9 h1.52 r270
  text "PC5" at 109.3,120.9 h1.52 r270
  text "PC4" at 111.6,120.9 h1.52 r270
  text "PA7" at 114.1,120.9 h1.52 r270
  text "PA6" at 116.6,120.9 h1.52 r270
  text "PA5" at 119.2,120.9 h1.52 r270
  text "PA4" at 121.7,120.9 h1.52 r270
  text "PA2" at 124.2,120.9 h1.52 r270
  text "3V3" at 126.8,120.9 h1.52 r270
  text "3V3" at 129.3,120.9 h1.52 r270
  text "VDDA" at 131.9,120.9 h1.52 r270
  text "PA2" at 134.4,120.9 h1.52 r270
  text "PC2" at 136.9,120.9 h1.52 r270
  text "PC1" at 139.5,120.9 h1.52 r270
  text "PC0" at 142,120.9 h1.52 r270
  text "XOUT" at 144.5,120.9 h1.52 r270
  text "XIN" at 147.1,120.9 h1.52 r270
  text "nRST" at 149.6,120.9 h1.52 r270
  text "PC13" at 152.2,120.9 h1.52 r270
  text "PB8" at 154.7,120.9 h1.52 r270
  text "PB9" at 157.2,120.9 h1.52 r270
  text "PB5" at 159.8,120.9 h1.52 r270
  text "PB4" at 162.3,120.9 h1.52 r270
  text "PD2" at 164.8,120.9 h1.52 r270
  text "PC12" at 167.4,120.9 h1.52 r270
  text "PC11" at 169.9,120.9 h1.52 r270
  text "PC10" at 172.5,120.9 h1.52 r270
  text "PA15" at 175,120.9 h1.52 r270
  text "B" at 177.4,118.11 h8
Board Outline (M30):
  the board outline again, w0.1